# EAGLE board CC2530-CP2102-USB-V01-014 (EAGLE 9.1.0)
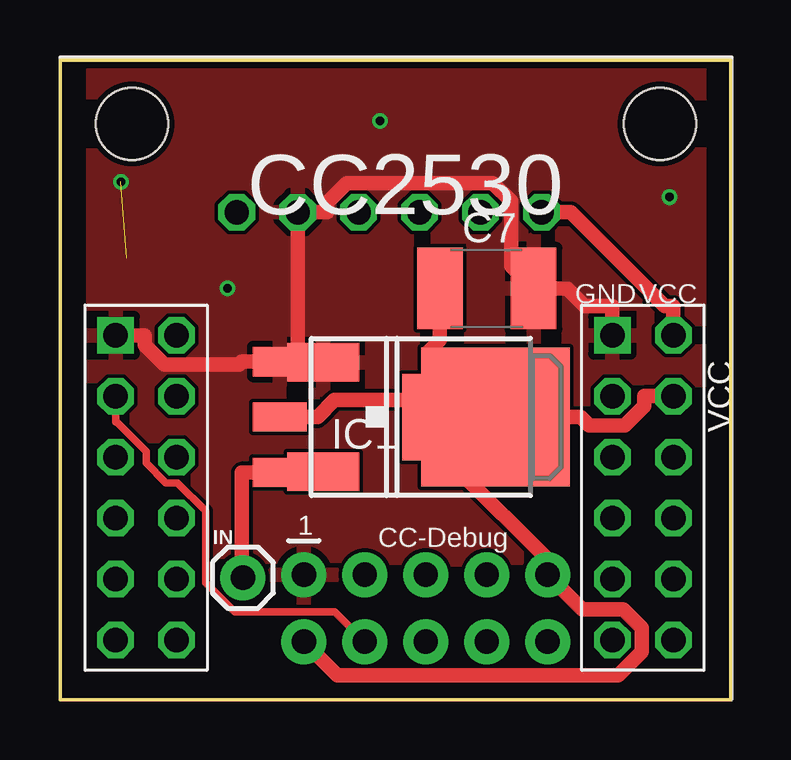
[diagram p0: board, top side]
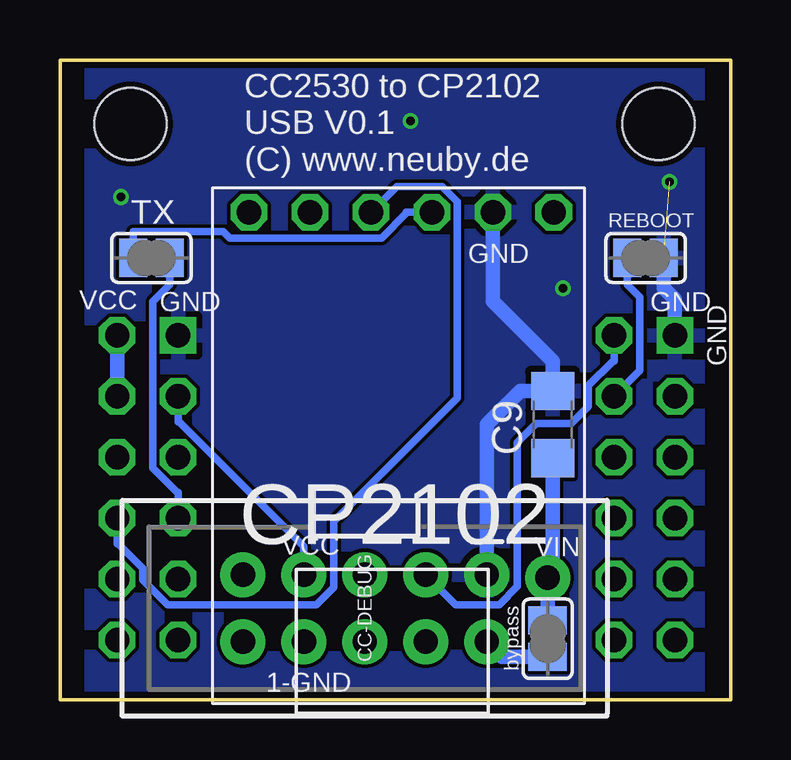
[diagram p1: board, bottom side, seen from below]

Size 27.94 x 26.67 mm. Coordinates in mm from the lower left corner, seen from the top.
Outline: 0,0 0,26.67 27.94,26.67 27.94,0 0,0
Copper layers (1*16): Top 0.035mm / dielectric 1.5mm / Bottom 0.035mm
Design rules "SeeedStudio_2layer_DRU_no_angle_20140221": minimum track width 6mil, minimum drill 12mil, track to track 6mil, track to pad 6mil, pad to pad 6mil, via to via 6mil, smd to smd 0mil, copper to edge 10mil, drill to drill 10mil, minimum pad ring 10mil, minimum via ring 6mil, stop-mask expansion 2mil, vias tented up to drill 100mil, thermal gap 10mil
Net classes: 0 default: width 0.305 mm; 1 PWR: width 0.61 mm
Holes 3 mm at 3,24 25,24
tRestrict: area 0,0 to 1,27; area 27,0 to 28,27
bRestrict: area 0,0 to 1,27; area 27,0 to 28,27

## Footprints (pad centres in the part's own frame; a part is rotated, then mirrored left to right if it is on the bottom)
C1812 = smd 1.9 x 3.4: 1 -1.95,0; 2 1.95,0
C1206 = smd 1.6 x 1.8: 1 -1.4,0; 2 1.4,0
2X5-SHROUDED_LOCK = drill 1.016 pad 1.88: 1 -1.397,5.08; 2 1.397,5.08; 3 -1.397,2.54; 4 1.397,2.54; 5 -1.397,0; 6 1.397,0; 7 -1.397,-2.54; 8 1.397,-2.54; 9 -1.397,-5.08; 10 1.397,-5.08
SJ = smd 1.168 x 1.6: 1 -0.762,0; 2 0.762,0
DPACK = smd 1.6 x 3: 1 -2.28,-4.8; 3 2.28,-4.8 | smd 5.8 x 6.2: 4 0,2.38
SOT223 = smd 1.219 x 2.235: 1 -2.311,-3.099; 2 0,-3.099; 3 2.311,-3.099 | smd 3.6 x 2.2: TAB 0,3.099
1X01 = drill 1.016 pad 1.88: 1 0,0
CP2101-BEAKOUT = drill 1.016 octagon: 3V3 13.97,1.016; 5V 1.27,1.016; DTR 11.43,1.016; GND 3.81,1.016; RXD 8.89,1.016; TXD 6.35,1.016
CC2530_DIL = drill 1.016 square: GND 2.316,15.19; GND2 23.017,15.19 | drill 1.016 octagon: P0_0 23.017,10.11; P0_1 25.557,10.11; P0_2\U_RX 23.017,7.57; P0_3\U_TX 25.557,7.57; P0_4 23.017,5.03; P0_5 25.557,5.03; P0_6 23.017,2.49; P0_7 25.557,2.49; P1_0 4.856,2.49; P1_1 2.316,2.49; P1_2 4.856,5.03; P1_3 2.316,5.03; P1_4 4.856,7.57; P1_5 2.316,7.57; P1_6 4.856,10.11; P1_7 2.316,10.11; P2_0 4.856,12.65; P2_1 2.316,12.65; P2_2 4.856,15.19; RST 23.017,12.65; VCC 25.557,15.19; VCC2 25.557,12.65

## Placement (x,y rotation side)
C7  [C1812]  17.78,17.14 180 top
C9  0.1uF  [C1206]  7.41,11.47 90 bottom
CC-DEBUG  [2X5-SHROUDED_LOCK]  15.24,3.81 270 bottom
EXT  [SJ]  7.62,2.54 90 bottom
IC1  LD117ADT50TR  [DPACK]  15.76,11.78 270 top
IC6  LM1117MPX-ADJ  [SOT223]  12.26,11.78 270 top
IN  [1X01]  7.62,5.08 0 top
REBOOT  [SJ]  3.54,18.41 180 bottom
TX  [SJ]  24.13,18.41 0 bottom
U$1  CP2101  [CP2101-BEAKOUT]  6.1,21.34 180 bottom
U$3  CC2530_MODULE  [CC2530_DIL]  0,0 0 top

## Library data of the parts
C7 C9 = rcl; SPICEPREFIX: C
CC-DEBUG = SparkFun-Connectors; PROD_ID: CONN-08671; SF_ID: PRT-08506
EXT REBOOT TX = jumper
IC1 = v-reg
IC6 = lm1117
IN = SparkFun-Connectors
U$1 = Martin-USB-V001
U$3 = Martin-Communication-V4

## Nets
5V: U$1.5V
CS: CC-DEBUG.5
DC: CC-DEBUG.3 U$3.P2_2
DD: CC-DEBUG.4 U$3.P2_1
GND [PWR]: C7.1 C9.2 CC-DEBUG.1 IC1.1 IC6.1 REBOOT.1 U$1.GND U$3.GND U$3.GND2
IN [PWR]: C9.1 EXT.2 IC1.3 IC6.3 IN.1
MISO: CC-DEBUG.10
MOSI: CC-DEBUG.8
N$1: REBOOT.2 U$3.P2_0
N$2: TX.2 U$3.P0_2\U_RX
N$3: U$1.RXD U$3.P0_3\U_TX
N$4: TX.1 U$1.TXD
RST: CC-DEBUG.7 U$3.RST
SCLK: CC-DEBUG.6
VCC [PWR]: C7.2 CC-DEBUG.2 CC-DEBUG.9 EXT.1 IC1.4 IC6.2 IC6.TAB U$1.3V3 U$3.VCC U$3.VCC2

## Tracks (layer width: path | path; a pad name or v marks a point on that pad's centre or on a via)
DC
  Bottom 0.305: U$3.P2_2 4.86,14.12 4.9,14.12 5.92,13.1 5.92,12.23 6.63,11.52 8.1,11.52 8.89,10.73 8.89,4.72 9.65,3.96 11.45,3.96 CC-DEBUG.3
DD
  Top 0.305: U$3.P2_1 2.32,11.58 2.36,11.58 3.59,10.36 3.59,9.87 4.41,9.04 4.89,9.04 6.08,7.86 6.08,4.86 7.28,3.66 11.46,3.66 CC-DEBUG.4
GND  (via drill 0.35)  (1 unrouted)
  Top 0.61: 9.91,14.09 IC6.1 7.58,14.09 7.46,13.97 4.34,13.97 3.54,14.78 3.54,15.19 U$3.GND | 9.91,14.09 U$1.GND 11.12,20.32 11.12,20.73 11.94,21.54 18.03,21.54 18.8,20.78 18.8,18.08 C7.1 21.14,17.14 21.87,16.41 23.02,16.41 U$3.GND2 | 9.91,14.09 10.93,14.09 IC1.1
  Bottom 0.61: CC-DEBUG.1 10.16,11.48 8.77,12.87 C9.2 7.41,14.13 9.91,16.62 U$1.GND | REBOOT.1 2.78,17.16 2.32,16.7 U$3.GND
  other vias: 2.54,21.59 13.34,24.13 25.4,20.95 6.99,17.14
  pour Bottom: 0.64,0.64 0.64,26.04 27.3,26.04 27.3,0.64
  pour Top: 0.64,26.04 27.3,26.04 27.3,0.64 0.64,0.64
IN
  Top 0.61: IN.1 7.58,5.12 7.58,9.47 IC6.3 10.93,9.47 IC1.3
  Bottom 0.61: C9.1 7.41,5.29 IN.1 EXT.2
N$1
  Bottom 0.305: REBOOT.2 4.3,17.31 3.79,16.79 3.79,13.72 U$3.P2_0
N$2
  Bottom 0.305: TX.2 23.37,17.31 24.09,16.59 24.09,9.66 23.06,8.64 23.02,8.64 U$3.P0_2\U_RX
N$3
  Bottom 0.305: U$3.P0_3\U_TX 25.56,6.5 25.52,6.5 24.49,5.48 24.49,4.99 23.45,3.96 17.27,3.96 16.53,4.69 16.53,7.43 11.38,12.59 11.38,20.77 12,21.39 13.91,21.39 U$1.RXD
N$4
  Bottom 0.305: TX.1 24.89,19.52 21.13,19.52 20.86,19.25 14.54,19.25 13.51,20.28 13.51,20.32 U$1.TXD
RST
  Bottom 0.305: U$3.RST 23.02,11.58 22.98,11.58 17.78,6.39 CC-DEBUG.7
VCC
  Top 0.61: U$3.VCC2 24.34,12.65 24.34,12.24 23.53,11.43 22.05,11.43 21.7,11.78 IC1.4 18.14,11.02 16.64,9.52 | 16.64,9.52 15.36,9.52 IC6.TAB 15.36,12.48 | 16.64,9.52 20.32,5.85 CC-DEBUG.9 21.77,3.76 23.47,3.76 24.24,3 24.24,1.98 23.27,1.01 11.56,1.01 CC-DEBUG.2 | 15.36,12.48 15.36,14.51 15.83,14.99 C7.2 | 15.36,12.48 11.43,12.48 10.73,11.78 IC6.2 | U$3.VCC 25.56,16.41 25.2,16.41 21.29,20.32 U$1.3V3
  Bottom 0.61: EXT.1 9.53,1.78 CC-DEBUG.2 | U$3.VCC2 U$3.VCC

## Text on the board
tNames: GND | VCC | VCC | 1 | CC-Debug
bNames: GND | CC2530 to CP2102 / USB V0.1 / (C) www.neuby.de | GND | VCC | GND | GND | GND | VIN | VCC | bypass | 1-GND